# EAGLE board ps2-qmouse (EAGLE 6.5.0)
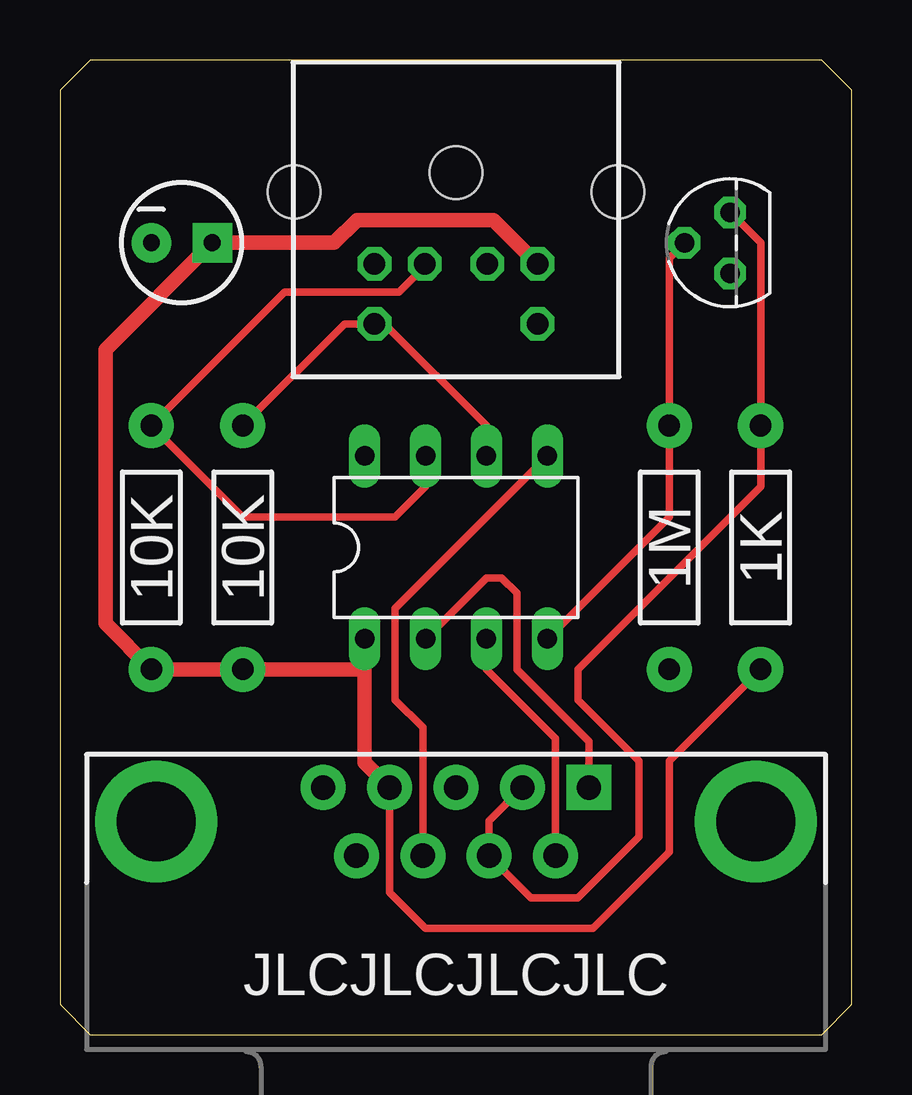
[diagram p0: board, top side]
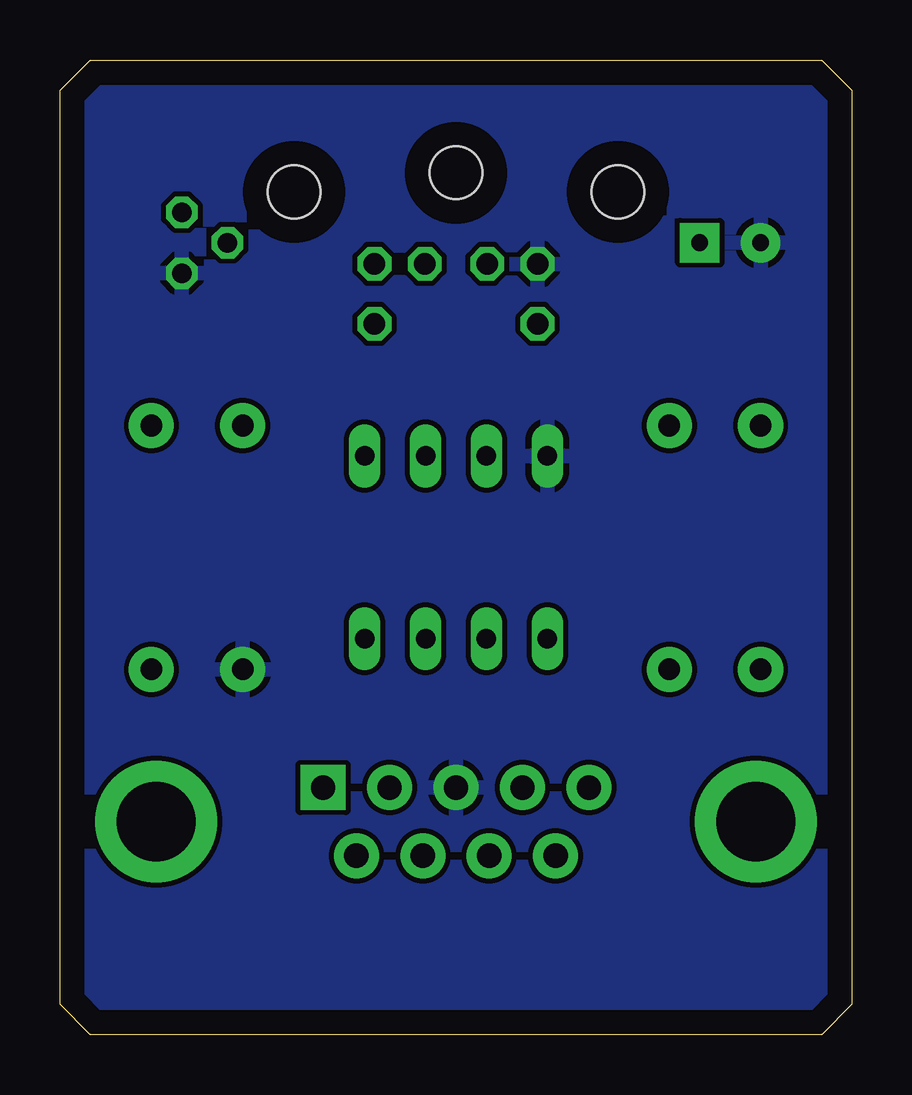
[diagram p1: board, bottom side, seen from below]

Size 33.02 x 40.64 mm. Coordinates in mm from the lower left corner, seen from the top.
Outline: 0,1.27 1.27,0 31.75,0 33.02,1.27 33.02,39.37 31.75,40.64 1.27,40.64 0,39.37 0,1.27
Copper layers (1*16): Top 0.035mm / dielectric 1.5mm / Bottom 0.035mm
Design rules "default": minimum track width 10mil, minimum drill 24mil, track to track 8mil, track to pad 8mil, pad to pad 8mil, via to via 8mil, smd to smd 8mil, copper to edge 40mil, drill to drill 8mil, minimum pad ring 10mil, minimum via ring 8mil, stop-mask expansion 4mil, vias tented up to drill 0mil, thermal gap 10mil

## Footprints (pad centres in the part's own frame; a part is rotated, then mirrored left to right if it is on the bottom)
DB9 = drill 1.016 pad 1.88 square: 1 -5.54,-1.42 | drill 1.016 pad 1.88: 2 -2.77,-1.42; 3 0,-1.42; 4 2.77,-1.42; 5 5.54,-1.42; 6 -4.15,1.42; 7 -1.38,1.42; 8 1.38,1.42; 9 4.15,1.42 | drill 3.302 pad 5.08: G1 -12.5,0; G2 12.5,0
DIL08 = drill 0.813 long: 1 -3.81,-3.81; 2 -1.27,-3.81; 3 1.27,-3.81; 4 3.81,-3.81; 5 3.81,3.81; 6 1.27,3.81; 7 -1.27,3.81; 8 -3.81,3.81
TO92 = drill 0.813 octagon: 1 -1.27,0; 2 0,1.905; 3 1.27,0
CPOL-RADIAL-10UF-25V = drill 0.7 pad 1.651 square: 1 1.27,0 | drill 0.7 pad 1.651: 2 -1.27,0
AXIAL-0.4 = drill 0.9 pad 1.88: P$1 -5.08,0; P$2 5.08,0
SSV-BC06 = drill 0.9 octagon: 1 1.3,8.5; 2 -1.3,8.5; 3 3.4,8.5; 4 -3.4,8.5; 5 3.4,11; 6 -3.4,11 | hole 2.2: -6.75,5.5; 0,4.7; 6.75,5.5

## Placement (x,y rotation side)
E$1  [DB9]  16.51,8.89 180 top
E$2  [DIL08]  16.51,20.32 0 top
E$3  [TO92]  27.94,33.02 90 top
E$4  [CPOL-RADIAL-10UF-25V]  5.08,33.02 0 top
E$5  [AXIAL-0.4]  25.4,20.32 90 top
E$6  [AXIAL-0.4]  29.21,20.32 90 top
E$7  [AXIAL-0.4]  3.81,20.32 90 top
E$8  [AXIAL-0.4]  7.62,20.32 90 top
E$9  [SSV-BC06]  16.51,40.64 180 top

## Library data of the parts
E$1 = SparkFun-Connectors
E$2 = ic-package
E$3 = linear
E$4 = SparkFun-Capacitors
E$5-E$8 = SparkFun-Passives
E$9 = con-yamaichi

## Nets
GND: E$1.3 E$2.8 E$3.1 E$4.2 E$5.P$1 E$9.3
S$1: E$1.4 E$2.1 E$4.1 E$6.P$1 E$7.P$1 E$8.P$1 E$9.4
S$3: E$2.7 E$7.P$2 E$9.1
S$4: E$2.6 E$8.P$2 E$9.5
S$5: E$1.8 E$2.5
S$6: E$2.4 E$3.2 E$5.P$2
S$7: E$1.2 E$1.7 E$3.3 E$6.P$2
S$8: E$1.1 E$2.2
S$9: E$1.6 E$2.3

## Tracks (layer width: path | path; a pad name or v marks a point on that pad's centre or on a via)
GND
  pour Bottom: 0.64,1.27 1.27,0.64 31.75,0.64 32.38,1.27 32.38,39.37 31.75,40.01 1.27,40.01 0.64,39.37
S$1
  Top 0.305: E$6.P$1 25.4,11.43 25.4,7.62 22.23,4.45 15.24,4.45 13.74,5.95 E$1.4
  Top 0.61: E$9.4 18.08,33.97 12.38,33.97 11.43,33.02 E$4.1 1.91,28.57 1.91,17.14 E$7.P$1 E$8.P$1 12.7,15.24 | E$2.1 12.7,15.24 | 12.7,15.24 12.7,11.35 E$1.4
S$3
  Top 0.305: E$9.1 15.21,32.04 14.13,30.96 9.37,30.96 E$7.P$2 7.62,21.59 13.97,21.59 15.24,22.86 E$2.7
S$4
  Top 0.305: E$2.6 17.78,25.4 13.54,29.64 E$9.5 11.86,29.64 E$8.P$2
S$5
  Top 0.305: E$2.5 13.97,17.78 13.97,13.97 15.13,12.81 E$1.8
S$6
  Top 0.305: E$3.2 25.4,32.38 E$5.P$2 25.4,21.59 E$2.4
S$7
  Top 0.305: E$1.2 17.89,8.92 E$1.7 19.64,5.71 21.59,5.71 24.13,8.26 24.13,11.43 21.59,13.97 21.59,15.24 29.21,22.86 E$6.P$2 29.21,33.02 E$3.3
S$8
  Top 0.305: E$1.1 22.05,12.24 19.05,15.24 19.05,18.41 18.41,19.05 17.78,19.05 E$2.2
S$9
  Top 0.305: E$2.3 17.78,15.24 20.66,12.36 E$1.6

## Text on the board
tNames: 10K | 10K | 1M | 1K | JLCJLCJLCJLC